# Altium PCB PowerSupply12v30A.PcbDoc
Units mm, origin at the board's own origin, x right, y up, seen from the top; angles counter-clockwise.
Board outline 152.4 x 101.6 mm, 2 copper layers (Top Layer, Bottom Layer); 41 components, 22 nets, 97 pads, 24 vias.
Unrouted connection lines stored in the file: 22.
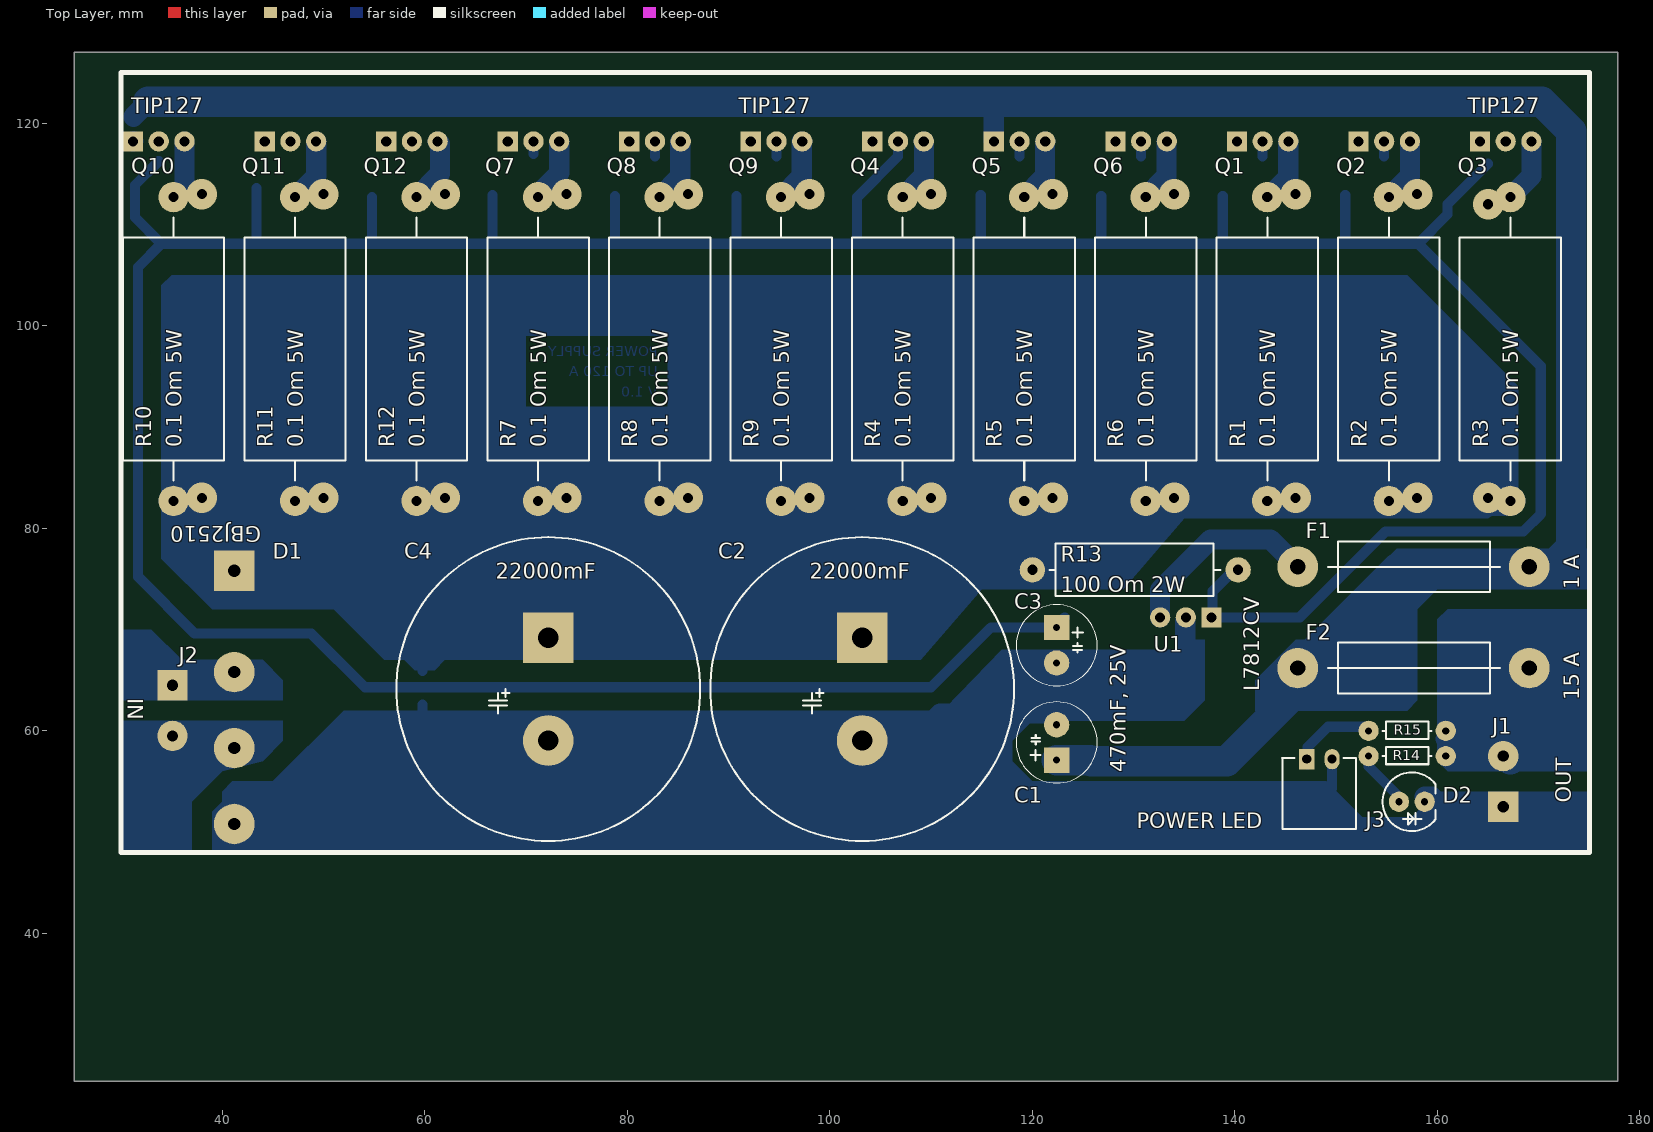
[diagram p0: Top Layer view]
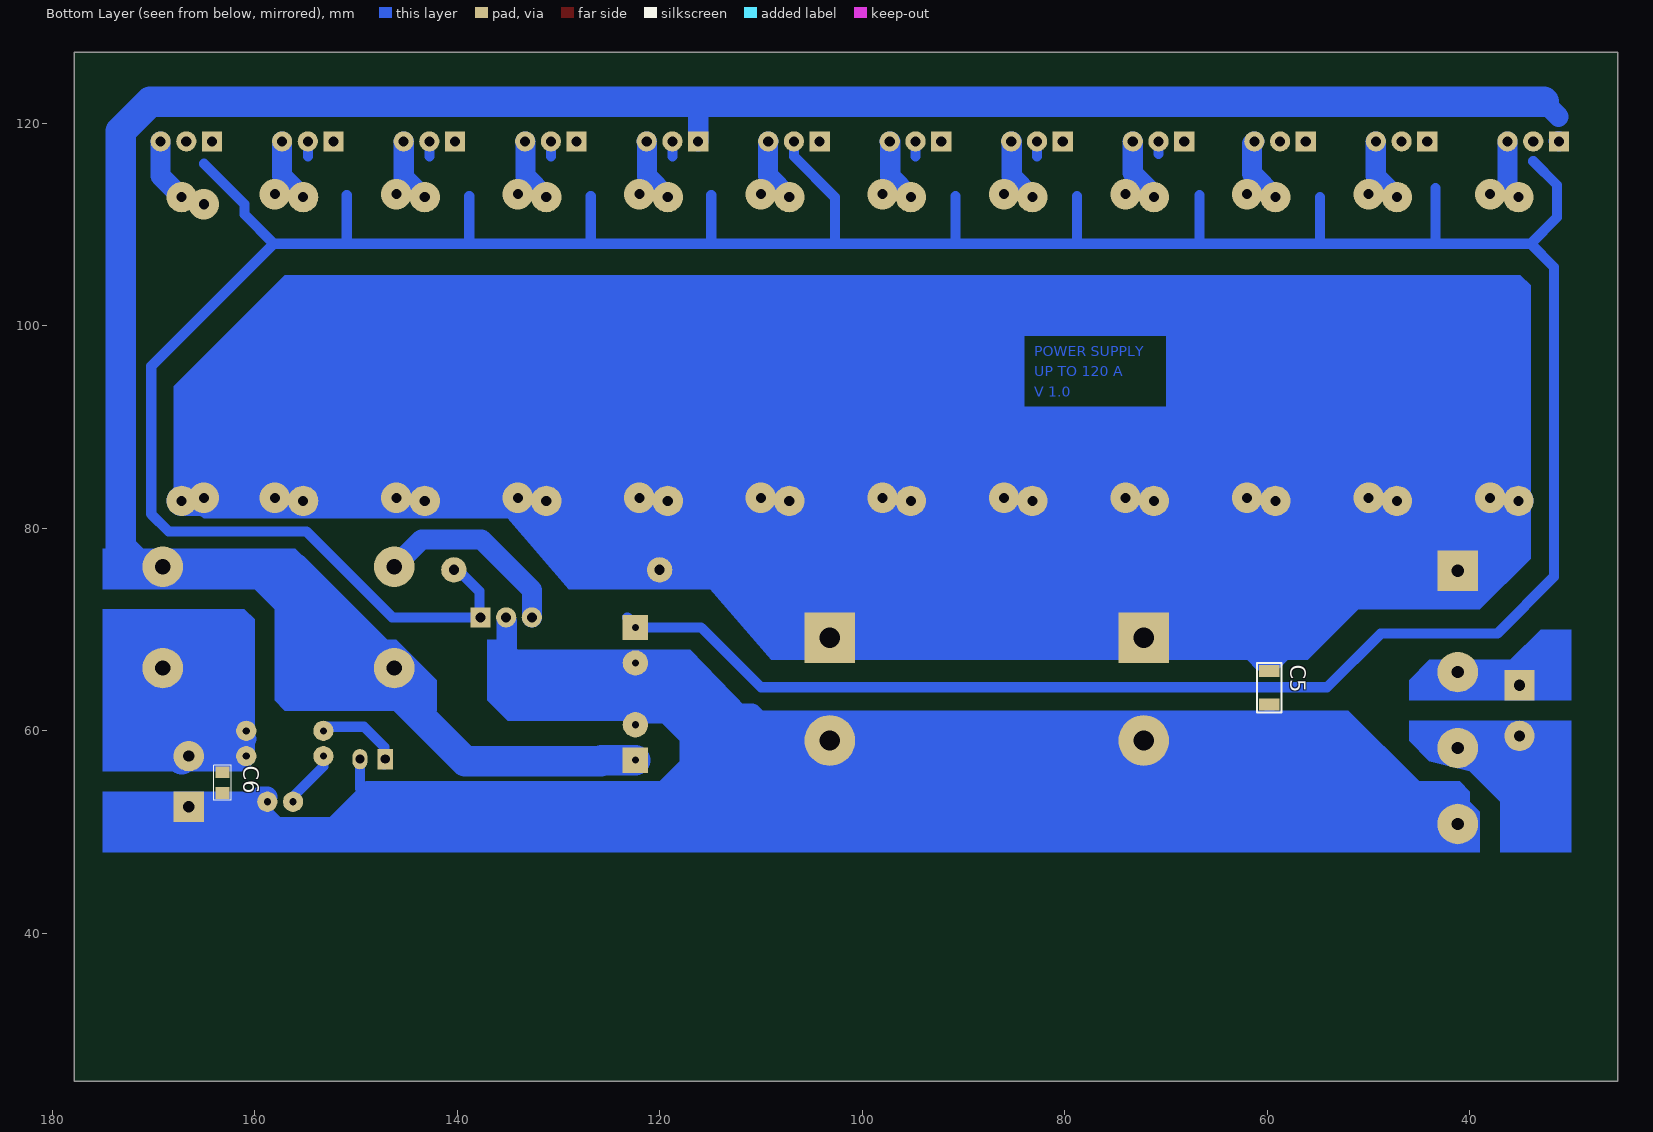
[diagram p1: Bottom Layer view, seen from below]
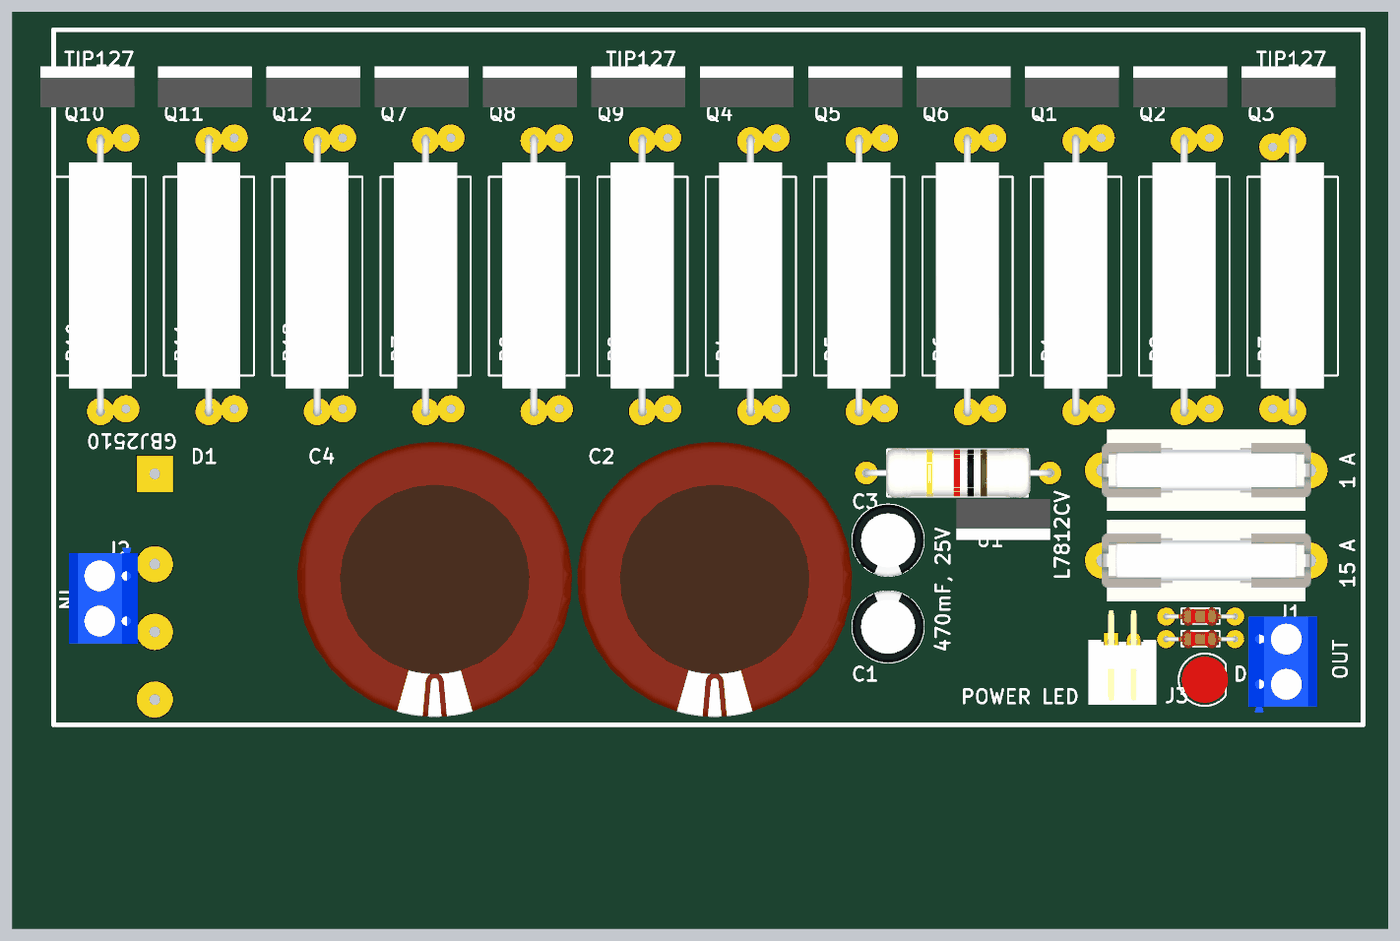
[diagram p2: 3D render of the assembled board from above, using the file's embedded part models]

## Layer stack, top to bottom
Top Solder: solder mask 0.0102, Solder Resist, Dk 3.5
Top Layer: signal copper 0.0356
Dielectric 1: dielectric 0.32, FR-4, Dk 4.8
Bottom Layer: signal copper 0.0356
Bottom Solder: solder mask 0.0102, Solder Resist, Dk 3.5

## Board outline
25.4,25.4 177.8,25.4 177.8,127 25.4,127

## Design rules (kind name [scope] priority, off if disabled: settings)
Clearance [All] p1: gap=0.5
Height [All] p1: minheight=0 maxheight=60 prefheight=12.7
HoleSize [All] p1: absolutevalues=TRUE maxlimit=5 minlimit=0.4 maxpercent=80.000 minpercent=20.000
PlaneConnect [All] p1: planeconnectstyle=Relief reliefexpansion=0.5 reliefentries=4 reliefconductorwidth=0.5 reliefairgap=0.5
PolygonConnect [All] p1: connectstyle=Relief reliefconductorwidth=0.5 reliefentries=4 polygonreliefangle="90 Angle" airgapwidth=0.5
RoutingVias [All] p1: holewidth=0.711 width=1.27 viastyle="Through Hole" minholewidth=0.711 minwidth=1.27 maxholewidth=0.711 maxwidth=1.27
SolderMaskExpansion [All] p1: expansion=0.102
Width [All] p1: maxlimit=5 minlimit=1 preferedwidth=2
26 further rules are at their usual default settings.

## Components (designator, comment, footprint, x,y, rotation, side; value= is the part's Value field where it differs from the comment)
C1 "470mF, 25V" "Cap E p3.5mm D8xH12" 122.4,57.1 r90 top
C2 "22000mF" "Cap E p10mm D30mm (4p)" 103.2,69.2 r270 top
C3 "470mF, 25V" "Cap E p3.5mm D8xH12" 122.4,70.2 r270 top
C4 "22000mF" "Cap E p10mm D30mm (4p)" 72.2,69.2 r270 top
C5 "100pF" "SMD 1206 (3216)" 59.8,65.9 r270 bottom
C6 "100pF" "SMD 0805 (2012)" 163.2,55.9 r270 bottom
D1 "GBJ2510" GBJ 41.2,75.8 r270 top
D2 "Red" "LED Round 5mm red" 156.2,53 r0 top
F1 "1 A" "Fuse 9p" 146.2,76.2 r0 top
F2 "15 A" "Fuse 9p" 146.2,66.2 r0 top
J1 "OUT" "DG301 5mm 2p" 166.5,52.5 r90 top
J2 "IN" "DG301 5mm 2p" 35.1,64.5 r270 top
J3 "POWER LED" "CWF-2 R" 149.6,57.2 r270 top
Q1 "TIP127" TO220-2 140.2,118.2 r270 top
Q2 "TIP127" TO220-2 152.2,118.2 r270 top
Q3 "TIP127" TO220-2 164.2,118.2 r270 top
Q4 "TIP127" TO220-2 104.2,118.2 r270 top
Q5 "TIP127" TO220-2 116.2,118.2 r270 top
Q6 "TIP127" TO220-2 128.2,118.2 r270 top
Q7 "TIP127" TO220-2 68.2,118.2 r270 top
Q8 "TIP127" TO220-2 80.2,118.2 r270 top
Q9 "TIP127" TO220-2 92.2,118.2 r270 top
Q10 "TIP127" TO220-2 31.2,118.2 r270 top
Q11 "TIP127" TO220-2 44.2,118.2 r270 top
Q12 "TIP127" TO220-2 56.2,118.2 r270 top
R1 "0.1 Om 5W" "Res 5W L22mm, p30mm" 143.2,82.7 r90 top
R2 "0.1 Om 5W" "Res 5W L22mm, p30mm" 155.2,82.7 r90 top
R3 "0.1 Om 5W" "Res 5W L22mm, p30mm" 167.2,82.7 r90 top
R4 "0.1 Om 5W" "Res 5W L22mm, p30mm" 107.2,82.7 r90 top
R5 "0.1 Om 5W" "Res 5W L22mm, p30mm" 119.2,82.7 r90 top
R6 "0.1 Om 5W" "Res 5W L22mm, p30mm" 131.2,82.7 r90 top
R7 "0.1 Om 5W" "Res 5W L22mm, p30mm" 71.2,82.7 r90 top
R8 "0.1 Om 5W" "Res 5W L22mm, p30mm" 83.2,82.7 r90 top
R9 "0.1 Om 5W" "Res 5W L22mm, p30mm" 95.2,82.7 r90 top
R10 "0.1 Om 5W" "Res 5W L22mm, p30mm" 35.2,82.7 r90 top
R11 "0.1 Om 5W" "Res 5W L22mm, p30mm" 47.2,82.7 r90 top
R12 "0.1 Om 5W" "Res 5W L22mm, p30mm" 59.2,82.7 r90 top
R13 "100 Om 2W" "Res p20.32 (9p) 2w" 120,75.9 r0 top
R14 "560 Om" "Res p7.62 (4p) 0.25w" 153.2,57.5 r0 top
R15 "560 Om" "Res p7.62 (4p) 0.25w" 153.2,60 r0 top
U1 "L7812CV" TO220-2 137.7,71.2 r90 top

## Footprints (in the part's own frame and the unit in brackets; to place one, negate y for a bottom-side part, rotate by r counter-clockwise, add the part's x,y. Pads: shape width x height; smd on the part's side, far side on the other; paste and mask are expansions set on the pad)
"Cap E p3.5mm D8xH12" [mm] "D 8mm; H 12mm"
  rect 2.5x2.5 hole 0.7: 1(0,0)
  round 2.5 hole 0.7: 2(3.5,0)
  silkscreen extent -2.25,-4 5.75,4, body extent -2.22,-4 5.75,4, height 12.31
"Cap E p10mm D30mm (4p)" [mm] "D 30mm; H 47mm"
  rect 5x5 hole 2: 1(0,0)
  round 5 hole 2: 2(10.16,0)
  silkscreen extent -9.92,-15 20.08,15, body extent -10.16,-15.24 20.32,15.24, height 50.8
"CWF-2 R" [mm]
  rect 2x1.5 hole 0.9: 1(0,-2.5)
  oval 2x1.5 hole 0.9: 2(0,0)
  silkscreen extent -0.13,-4.92 6.88,2.38, body extent -3.5,-5 7,2.5, height 5.8
"DG301 5mm 2p" [mm]
  rect 3x3 hole 1.1: 1(0,0)
  round 3 hole 1.1: 2(5,0)
  body extent -3.1,-3.4 7.5,4.2, height 10
"Fuse 9p" [mm] "Fuse horisontal"
  round 4 hole 1.5: 1(0,0) 2(22.86,0)
  silkscreen extent 3,-2.5 20,2.5, body extent -0.14,-4.5 23.02,4.5, height 13.44
GBJ [mm] "Diode Bridge GBJ case"
  round 4 hole 1.2: G(25,0) P(10,0) Z(17.5,0)
  rect 4x4 hole 1.2: V(0,0)
  body extent -0.6,-1.4 25.7,2.9, height 20
"LED Round 5mm red" [mm]
  round 2 hole 0.7: A(0,0) K(2.54,0)
  silkscreen extent -1.62,-2.9 3.6,2.9, body extent -1.28,-2.55 3.82,2.55, height 8.8
"Res 5W L22mm, p30mm" [mm] "L22mm p30; horisontal"
  round 3 hole 1: 1(0,0) 2(30,0)
  silkscreen extent 2,-5 28,5, body extent -0.56,-3.48 30.72,3.52, height 8.35
"Res p7.62 (4p) 0.25w" [mm] "L p7.62; horisontal"
  round 2 hole 0.7: 1(0,0) 2(7.62,0)
  silkscreen extent 1.4,-0.8 6.2,0.9, body extent -0.3,-1 7.8,1, height 2.1
"Res p20.32 (9p) 2w" [mm] "L p20.32; horisontal"
  round 2.5 hole 1: 1(0,0) 2(20.32,0)
  silkscreen extent 1.7,-2.6 18.6,2.6, body extent -0.35,-2.75 20.67,2.75, height 5.5
"SMD 0805 (2012)" [mil]
  rect 45x55 smd: 1(0.35,0.98) 2(80.35,0.98)
  silkscreen extent -29,-32 109,34, body extent 1,-24 80,26, height 31
"SMD 1206 (3216)" [mm]
  rect 1.2x2 smd: 1(0,0) 2(3.3,0)
  silkscreen extent -0.8,-1.2 4.1,1.2, body extent 0.05,-0.75 3.25,0.85, height 1
TO220-2 [mm]
  rect 2x2 hole 1: 1(0,0)
  round 2 hole 1: 2(0,2.54) 3(0,5.08)
  body extent -2.7,-2.65 1.8,7.75, height 19

## Part data
C1 C3: library part "Cap E 470mF x 25V", "Capacitor"
C2 C4: library part "Cap E 22000mF x 25V", "Capacitor"
C5 C6: library part "Cap SMD 0402-1812", "Capacitor"
D1: library part "Bridge GBJ2510", "25 A Diode Bridge"
D2: library part "Led Round 5mm Red", "1.8-2v 20mA, 4-5cd"
F1 F2: library part Fuse, "Round fuse"
J1 J2: library part DG301-5.0-2P12, "DG301 series"
J3: library part "CWF-2 (R)", "CWF series"
Q1 Q2 Q3 Q4 Q5 Q6 Q7 Q8 Q9 Q10 Q11 Q12: "PNP Darlington Bipolar Transistor"
R1 R2 R3 R4 R5 R6 R7 R8 R9 R10 R11 R12: library part "Res 5W", "5W Cement"
R13: library part "Res 2W", "5W Cement"
R14 R15: library part "Res Carbon"
U1: "Voltage Regulator"

## Via types
v1: diameter 3, hole 1, Top Layer to Bottom Layer, 24 vias

## Nets (pads, with @x,y where several pads share a name; then routed paths per layer and width w, separated by ;. In a path a pad name is that pad's centre, name@x,y a point inside that pad or via, vN(x,y) a via of type N, cw(c..) or ccw(c..) an arc to the next point about the centre after c; other vN are vias at no path point)
12VOUT: C6.1 F2.2 J1.2 R14.2 R15.2 | length 17
  Bottom Layer w2: R15.2@160.82,59.2 162.82,57.2 J1.2@167.2,57.2
  Bottom Layer w3: J1.2@167.2,57.2 169.06,59.06 F2.2
"15V PH": D1.P J2.1 | length 6.8
  Bottom Layer w2: J2.1@35,64.3 35.6,64.3 37.1,65.8 D1.P
"15V ZERO": D1.Z J2.2 | length 7.2
  Bottom Layer w2: J2.2@35,59.3 36.7,57.6 40.5,57.6 D1.Z
EXTTRANSBASES: C3.1 Q1.2 Q2.2 Q3.2 Q4.2 Q5.2 Q6.2 Q7.2 Q8.2 Q9.2 Q10.2 Q11.2 Q12.2 R13.2 U1.1 | length 417
  Bottom Layer w1: 33.74,116.24 31.4,113.9 31.4,110.7 34,108.1 ; 43.4,113.6 43.4,108.1 ; 54.8,112.7 54.8,108.1 ; 66.7,112.9 66.7,108.1 ; 70.74,116.94 Q7.2 ; 78.8,112.8 78.8,108.1 ; 82.74,116.74 Q8.2 ; 90.8,112.8 90.8,108.1 ; 94.74,116.74 Q9.2 ; Q4.2 106.74,116.74 102.7,112.7 102.7,108.1 ; 114.9,112.9 114.9,108.1 ; 118.74,116.74 Q5.2 ; C3.1@123.2,71.2 122.2,70.2 115.9,70.2 110,64.3 54.1,64.3 48.8,69.6 37.3,69.6 31.7,75.2 31.7,105.8 34,108.1 ; 126.8,108.2 126.8,112.8 ; 130.74,116.74 Q6.2 ; 138.8,112.8 138.8,108.1 ; R13.2@140.12,76.1 137.8,73.78 137.8,71.2 146.4,71.2 154.9,79.7 168.5,79.7 170.2,81.4 170.2,96 158.1,108.1 ; 142.74,116.74 Q1.2 ; 150.9,112.9 150.9,108.1 ; 154.74,116.74 Q2.2 ; 165,116 161,112 161,111 158.1,108.1 ; 34,108.1 43.4,108.1 ; 43.4,108.1 54.8,108.1 ; 54.8,108.1 66.7,108.1 ; 66.7,108.1 78.8,108.1 ; 78.8,108.1 90.8,108.1 ; 90.8,108.1 102.7,108.1 ; 102.7,108.1 114.9,108.1 ; 114.9,108.1 138.8,108.1 ; 138.8,108.1 150.9,108.1 ; 150.9,108.1 158.1,108.1
GND: C1.2 C2.2 C3.2 C4.2 C5.2 C6.2 D1.G D2.K J1.1 J3.2 U1.2 | length 191
  Bottom Layer w1: 59.8,60.4 C5.2 ; 149.1,53.8 149.6,54.3 J3.2
  Bottom Layer w2: C2.2 108.24,59.04 110.9,61.7 122.2,61.7 122.2,66.7 134.8,66.7 135.1,67 U1.2@135.1,70.8 ; D2.K@158.74,53.5 159.44,53.5 160.74,52.2 J1.1@167.2,52.2
  Bottom Layer w3: D1.G@41,50.7 63.86,50.7 C4.2 C2.2 112.24,50 165,50 J1.1@167.2,52.2
NetD2_A: D2.A R14.1 | length 5.6
  Bottom Layer w1: R14.1@153.2,57.9 153.2,56.5 D2.A@156.2,53.5
NetF1_1: F1.1 U1.3 | length 19.5
  Bottom Layer w2: U1.3@132.6,71.2 132.6,73.9 137.6,78.9 143.5,78.9 F1.1
NetJ3_1: J3.1 R15.1 | length 8.5
  Bottom Layer w1: J3.1@147.2,56.7 147.2,58.4 149.2,60.4 R15.1@153.2,60.4
NetQ1_3: Q1.3 R1.2 | length 6.4
  Bottom Layer w2: R1.2 143.3,112.7 145.28,114.68 Q1.3
  other v1: 146,113
NetQ2_3: Q2.3 R2.2 | length 6.4
  Bottom Layer w2: R2.2 157.3,114.8 157.3,118.18 Q2.3
  other v1: 158,113
NetQ3_3: Q3.3 R3.2 | length 6.4
  Bottom Layer w2: R3.2 169.28,114.78 Q3.3
  other v1: 165,112
NetQ4_3: Q4.3 R4.2 | length 6.4
  Bottom Layer w2: R4.2 109.3,114.8 109.3,118.18 Q4.3
  other v1: 110,113
NetQ5_3: Q5.3 R5.2 | length 6.4
  Bottom Layer w2: R5.2 121.24,114.74 121.24,118.16 Q5.3
  other v1: 122,113
NetQ6_3: Q6.3 R6.2 | length 6.4
  Bottom Layer w2: R6.2 133.24,114.74 133.24,118.16 Q6.3
  other v1: 134,113
NetQ7_3: Q7.3 R7.2 | length 6.4
  Bottom Layer w2: R7.2 71.2,113 73.28,115.08 Q7.3
  other v1: 74,113
NetQ8_3: Q8.3 R8.2 | length 6.4
  Bottom Layer w2: R8.2 85.24,114.74 85.24,118.16 Q8.3
  other v1: 86,113
NetQ9_3: Q9.3 R9.2 | length 6.4
  Bottom Layer w2: R9.2 97.24,114.74 97.24,118.16 Q9.3
  other v1: 98,113
NetQ10_3: Q10.3 R10.2 | length 5.9
  Bottom Layer w2: R10.2 36.28,113.78 Q10.3
  other v1: 38,113
NetQ11_3: Q11.3 R11.2 | length 6.4
  Bottom Layer w2: R11.2 49.28,114.78 Q11.3
  other v1: 50,113
NetQ12_3: Q12.3 R12.2 | length 6.5
  Bottom Layer w2: R12.2 61.5,115 61.5,117.98 Q12.3
  other v1: 62,113
TIN: C2.1 C4.1 C5.1 D1.V R1.1 R2.1 R3.1 R4.1 R5.1 R6.1 R7.1 R8.1 R9.1 R10.1 R11.1 R12.1 R13.1 | length 195.1
  Bottom Layer w1: C5.1 59.8,68.5 59.9,68.6
  Bottom Layer w3: D1.V@41.65,76.25 R10.1 R11.1 R12.1 R7.1 R8.1 R9.1 R4.1 ; C4.1 C2.1 107.2,73.2 R4.1 ; 120.4,78.1 119.2,79.3 R5.1 ; R3.1 R2.1 R1.1 R6.1 R5.1 ; R4.1 R5.1
  other v1: 38,83 50,83 62,83 74,83 86,83 98,83 110,83 122,83 134,83 146,83 158,83 165,83
TOUT: C1.1 F1.2 F2.1 Q1.1 Q2.1 Q3.1 Q4.1 Q5.1 Q6.1 Q7.1 Q8.1 Q9.1 Q10.1 Q11.1 Q12.1 | length 249.5
  Bottom Layer w2: Q10.1 Q10.1@31.24,118.24 ; 31.24,120.64 32.7,122.1 ; Q5.1 116.2,121.9
  Bottom Layer w3: 32.7,122.1 170.3,122.1 173.2,119.2 173.2,78.1 171.3,76.2 F1.2 168.86,76 156,76 F2.1 146.2,64 139.2,57 125.8,57 125.7,57.1 C1.1

## Other copper
Bottom Layer:
  region net GND: 39,48 39,52 40,53 40,54 41,55 45,55 52,62 113,62 120,55 149,55 153,51 157,51 160,54 175,54 175,48
  region net TIN: 34,77 39,72 51,72 56,67 58,67 59,66 61,66 62,67 109,67 115,74 129,74 135,81 165,81 168,83 168,94 157,105 70,105 70,99 84,99 84,92 70,92 70,105 35,105 34,104
  region net 12VOUT: 175,72 161,72 160,71 160,57 161,56 175,56
  region net TOUT: 157,62 142,62 142,65 146,69 147,69 156,78 175,78 175,74 160,74 158,72 158,63
  pour cut-out: 70,99 70,92 84,92 84,99
  region net TIN: 69,105 71,105 71,99 69,99
  region net "15V ZERO": 44,57 40,56 37,53 37,48 30,48 30,61 46,61 46,59
  region net "15V PH": 30,63 46,63 46,65 44,67 36,67 33,70 30,70
  region net GND: 137,69 137,63 135,61 120,61 118,59 118,56 110,60.8 117,68 134,68 135,69
  text "POWER SUPPLY" at 83,97 h1
  text "UP TO 120 A" at 83,95 h1
  text "V 1.0" at 83,93 h1

## Silkscreen, mask and mechanical layers (free items; w line width, h text height)
Top Overlay:
  lines w0.5: 30,48 174,48 175,48 175,75 175,125 130,125 80,125 30,125 30,48